# Altium PCB PCB11.PcbDoc
Units mil, origin at the board's own origin, x right, y up, seen from the top; angles counter-clockwise.
Board outline 4185 x 2955 mil, 2 copper layers (Top Layer, Bottom Layer); 168 components, 62 nets, 423 pads, 7 vias.
Unrouted connection lines stored in the file: 80.
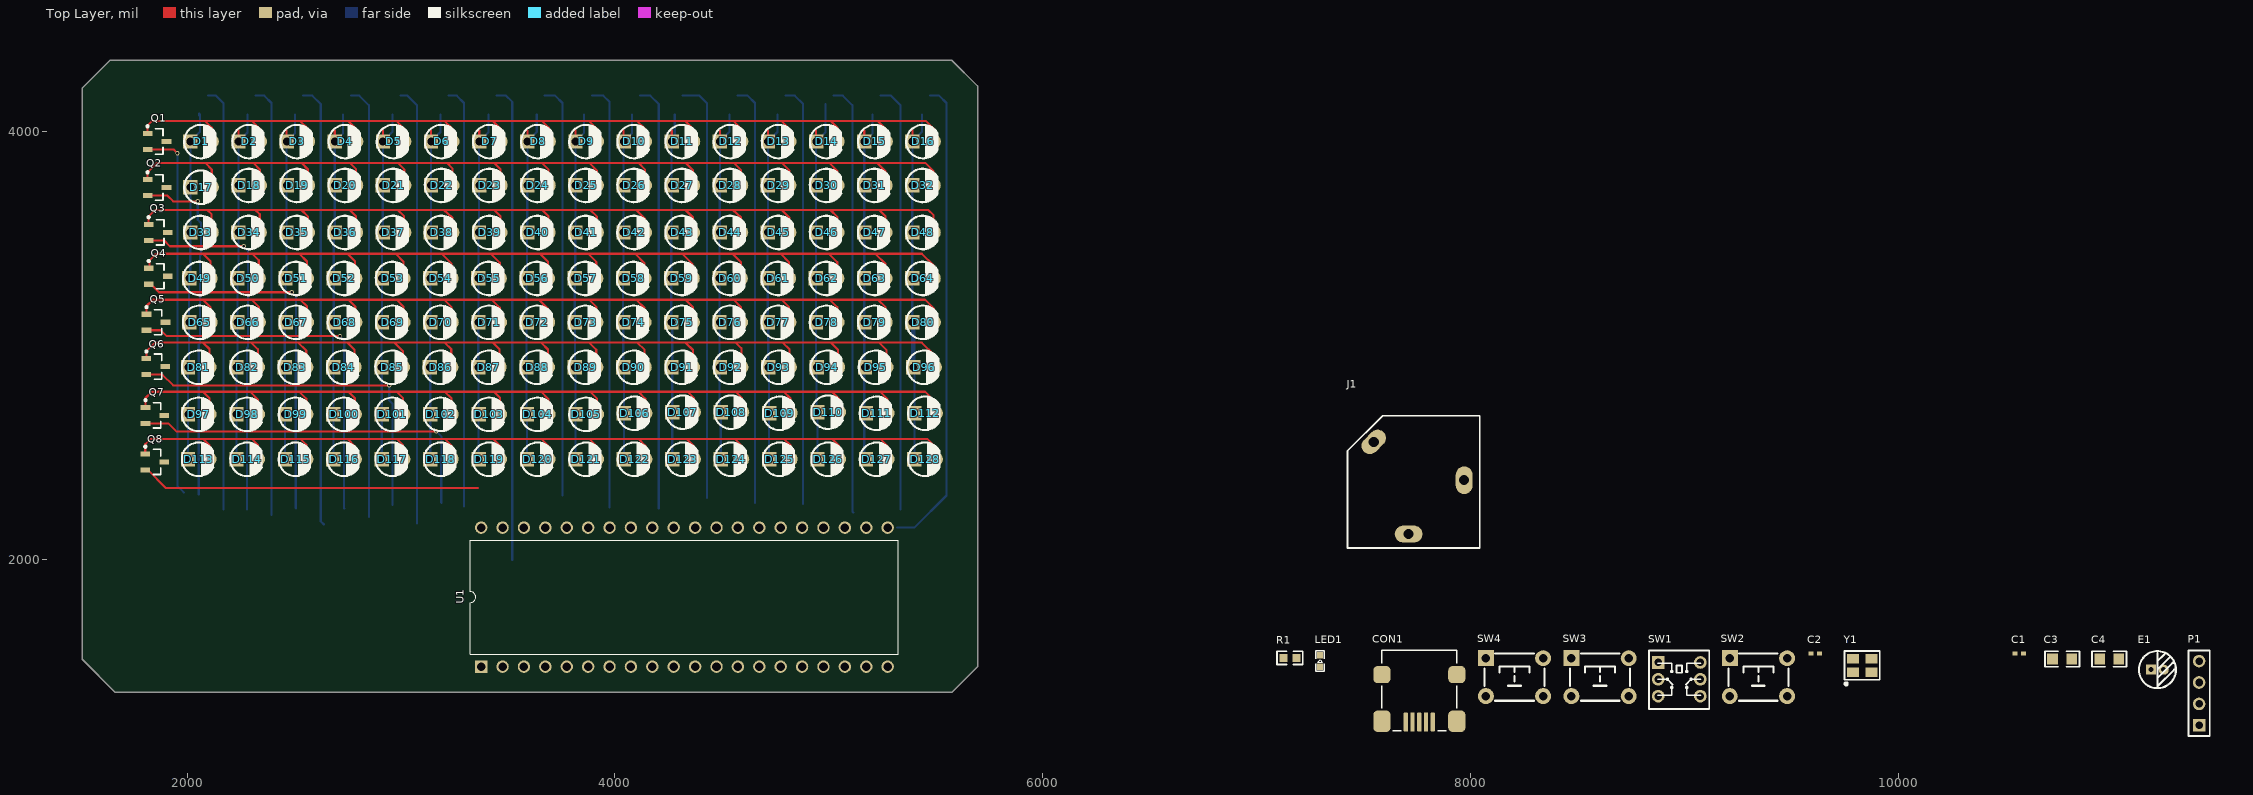
[diagram p0: Top Layer view]
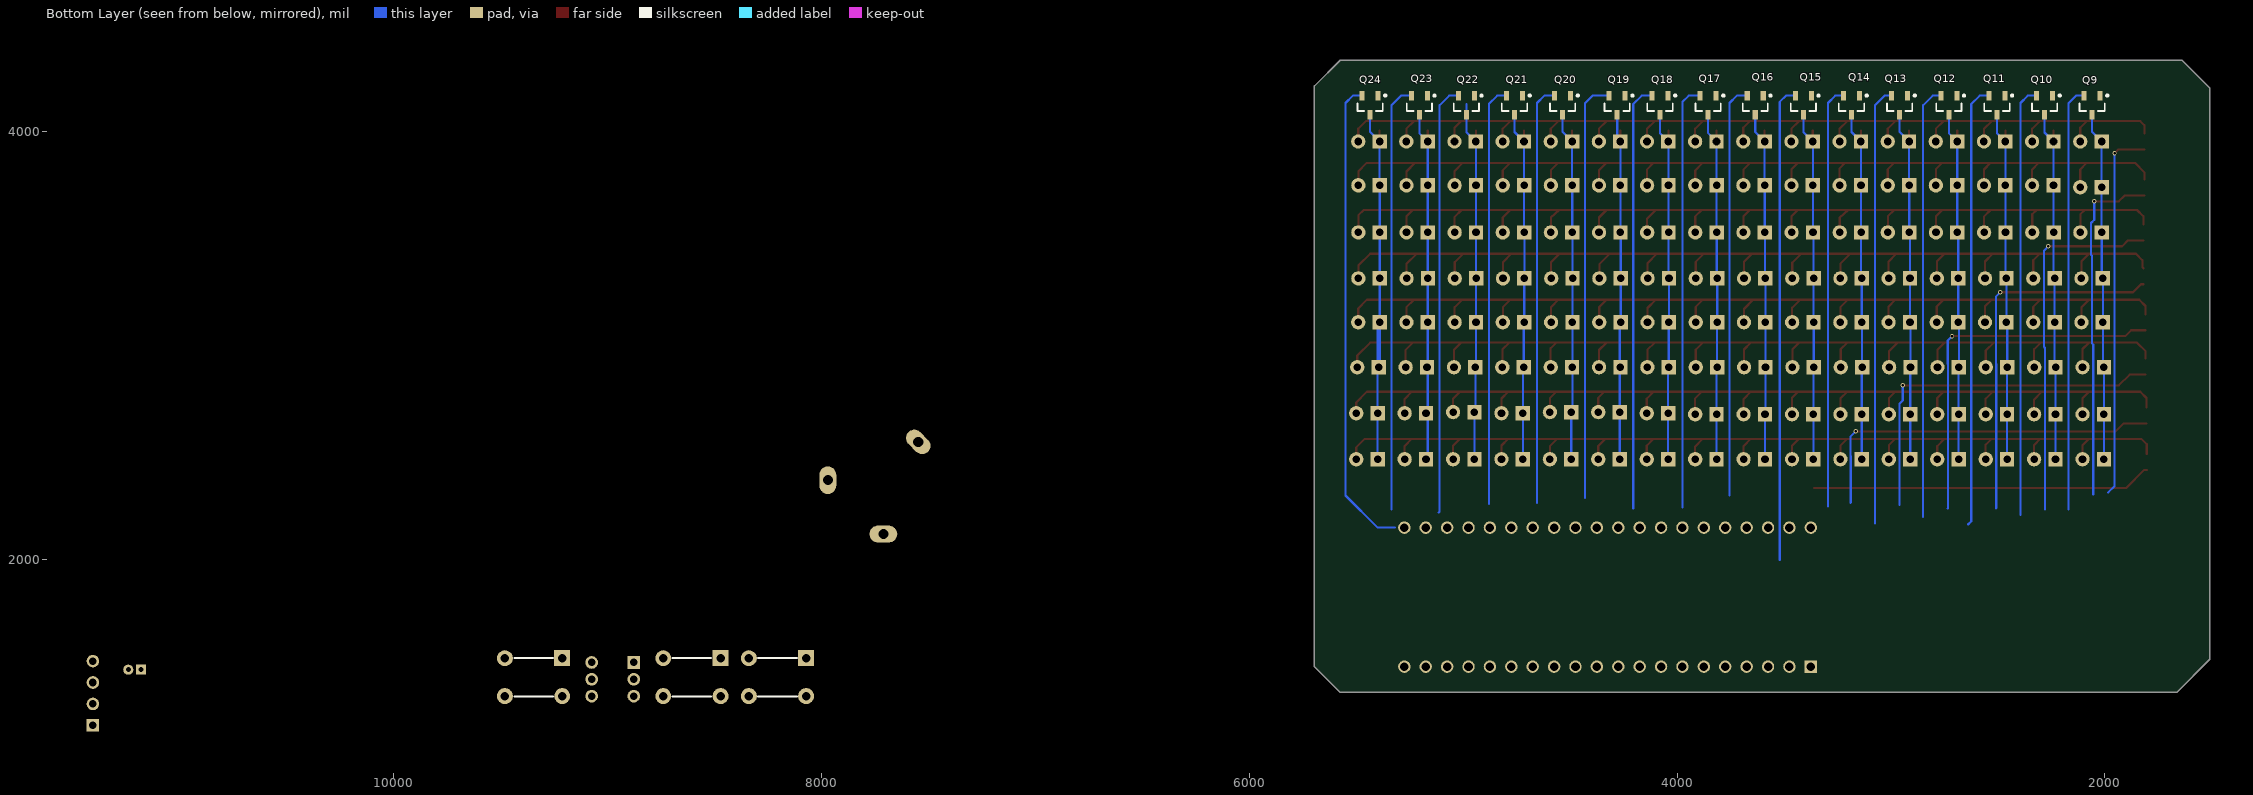
[diagram p1: Bottom Layer view, seen from below]

## Layer stack, top to bottom
Top Solder: solder mask 0.4, Solder Resist, Dk 3.5
Top Layer: signal copper 1.4
Dielectric 1: dielectric 12.6, FR-4, Dk 4.8
Bottom Layer: signal copper 1.4
Bottom Solder: solder mask 0.4, Solder Resist, Dk 3.5

## Board outline
1510,1535 1510,4205 1640,4335 5575,4335 5695,4215 5695,1500 5575,1380 1665,1380

## Design rules (kind name [scope] priority, off if disabled: settings)
Clearance [All] p1: gap=10 ignorepadtopadclearanceinfootprint=FALSE except(0: Arc-Hole Track-Hole SMDPad-Hole THPad-Hole Via-Hole Fill-Hole Poly-Hole Region-Hole Text-Hole)
PolygonConnect [All] p1: connectstyle=Relief reliefconductorwidth=10 reliefentries=4 polygonreliefangle="90 Angle" airgapwidth=10
RoutingVias [All] p1: holewidth=28 width=50 viastyle="Through Hole" minholewidth=28 minwidth=50 maxholewidth=28 maxwidth=50
SolderMaskExpansion [All] p1: expansion=4
Width [All] p1: maxlimit=10 minlimit=10 preferedwidth=10
30 further rules are at their usual default settings.

## Classes and differential pairs
component class Sheet3: D1 D2 D3 D4 D5 D6 D7 D8 D9 D10 D11 D12 D13 D14 D15 D16 D17 D18 D19 D20 D21 D22 D23 D24 D25 D26 D27 D28 D29 D30 D31 D32 D33 D34 D35 D36 D37 D38 D39 D40 D41 D42 D43 D44 D45 D46 D47 D48 D49 D50 D51 D52 D53 D54 D55 D56 D57 D58 D59 D60 D61 D62 D63 D64 D65 D66 D67 D68 D69 D70 D71 D72 D73 D74 D75 D76 D77 D78 D79 D80 D81 D82 D83 D84 D85 D86 D87 D88 D89 D90 D91 D92 D93 D94 D95 D96 D97 D98 D99 D100 D101 D102 D103 D104 D105 D106 D107 D108 D109 D110 D111 D112 D113 D114 D115 D116 D117 D118 D119 D120 D121 D122 D123 D124 D125 D126 D127 D128 Q1 Q2 Q3 Q4 Q5 Q6 Q7 Q8 Q9 Q10 Q12 Q13 Q14 Q15 Q16 Q17 Q18 Q19 Q20 Q21 Q22 Q23 Q24
component class Sheet2: C1 C2 C3 C4 CON1 E1 J1 LED1 P1 R1 SW1 SW2 SW3 SW4 U1 Y1

## Components (designator, comment, footprint, x,y, rotation, side; value= is the part's Value field where it differs from the comment)
C1 "Cap" 0402 10565.2,1561.06 r0 top value=30pF
C2 "Cap" 0402 9610.2,1561.06 r0 top value=30pF
C3 "104" "C 0805" 10765.2,1536.06 r0 top
C4 "104" "C 0805" 10985.2,1536.06 r0 top
CON1 "MiniUSB" USB_Mini-B 7760.2,1241.06 r0 top value="Type B"
D1 "LED0" "LED 3MM-R" 2065.71,3955 r0 top
D2 "LED0" "LED 3MM-R" 2290.71,3955 r0 top
D3 "LED0" "LED 3MM-R" 2515.71,3955 r0 top
D4 "LED0" "LED 3MM-R" 2740.71,3955 r0 top
D5 "LED0" "LED 3MM-R" 2965.71,3955 r0 top
D6 "LED0" "LED 3MM-R" 3190.71,3955 r0 top
D7 "LED0" "LED 3MM-R" 3415.71,3955 r0 top
D8 "LED0" "LED 3MM-R" 3640.71,3955 r0 top
D9 "LED0" "LED 3MM-R" 3865.71,3955 r0 top
D10 "LED0" "LED 3MM-R" 4090.71,3955 r0 top
D11 "LED0" "LED 3MM-R" 4315.71,3955 r0 top
D12 "LED0" "LED 3MM-R" 4540.71,3955 r0 top
D13 "LED0" "LED 3MM-R" 4765.71,3955 r0 top
D14 "LED0" "LED 3MM-R" 4990.71,3955 r0 top
D15 "LED0" "LED 3MM-R" 5215.71,3955 r0 top
D16 "LED0" "LED 3MM-R" 5440.71,3955 r0 top
D17 "LED0" "LED 3MM-R" 2065.71,3741.43 r0 top
D18 "LED0" "LED 3MM-R" 2290.66,3750 r0 top
D19 "LED0" "LED 3MM-R" 2515.61,3750 r0 top
D20 "LED0" "LED 3MM-R" 2740.57,3750 r0 top
D21 "LED0" "LED 3MM-R" 2965.52,3750 r0 top
D22 "LED0" "LED 3MM-R" 3190.47,3750 r0 top
D23 "LED0" "LED 3MM-R" 3415.42,3750 r0 top
D24 "LED0" "LED 3MM-R" 3640.38,3750 r0 top
D25 "LED0" "LED 3MM-R" 3865.33,3750 r0 top
D26 "LED0" "LED 3MM-R" 4090.28,3750 r0 top
D27 "LED0" "LED 3MM-R" 4315.24,3750 r0 top
D28 "LED0" "LED 3MM-R" 4540.19,3750 r0 top
D29 "LED0" "LED 3MM-R" 4765.14,3750 r0 top
D30 "LED0" "LED 3MM-R" 4990.09,3750 r0 top
D31 "LED0" "LED 3MM-R" 5215.05,3750 r0 top
D32 "LED0" "LED 3MM-R" 5440,3750 r0 top
D33 "LED0" "LED 3MM-R" 2065,3530 r0 top
D34 "LED0" "LED 3MM-R" 2290,3530 r0 top
D35 "LED0" "LED 3MM-R" 2515,3530 r0 top
D36 "LED0" "LED 3MM-R" 2740,3530 r0 top
D37 "LED0" "LED 3MM-R" 2965,3530 r0 top
D38 "LED0" "LED 3MM-R" 3190,3530 r0 top
D39 "LED0" "LED 3MM-R" 3415,3530 r0 top
D40 "LED0" "LED 3MM-R" 3640,3530 r0 top
D41 "LED0" "LED 3MM-R" 3865,3530 r0 top
D42 "LED0" "LED 3MM-R" 4090,3530 r0 top
D43 "LED0" "LED 3MM-R" 4315,3530 r0 top
D44 "LED0" "LED 3MM-R" 4540,3530 r0 top
D45 "LED0" "LED 3MM-R" 4765,3530 r0 top
D46 "LED0" "LED 3MM-R" 4990,3530 r0 top
D47 "LED0" "LED 3MM-R" 5215,3530 r0 top
D48 "LED0" "LED 3MM-R" 5440,3530 r0 top
D49 "LED0" "LED 3MM-R" 2060,3315 r0 top
D50 "LED0" "LED 3MM-R" 2285.33,3315 r0 top
D51 "LED0" "LED 3MM-R" 2510.67,3315 r0 top
D52 "LED0" "LED 3MM-R" 2736,3315 r0 top
D53 "LED0" "LED 3MM-R" 2961.33,3315 r0 top
D54 "LED0" "LED 3MM-R" 3186.67,3315 r0 top
D55 "LED0" "LED 3MM-R" 3412,3315 r0 top
D56 "LED0" "LED 3MM-R" 3637.33,3315 r0 top
D57 "LED0" "LED 3MM-R" 3862.67,3315 r0 top
D58 "LED0" "LED 3MM-R" 4088,3315 r0 top
D59 "LED0" "LED 3MM-R" 4313.33,3315 r0 top
D60 "LED0" "LED 3MM-R" 4538.67,3315 r0 top
D61 "LED0" "LED 3MM-R" 4764,3315 r0 top
D62 "LED0" "LED 3MM-R" 4989.33,3315 r0 top
D63 "LED0" "LED 3MM-R" 5214.66,3315 r0 top
D64 "LED0" "LED 3MM-R" 5440,3315 r0 top
D65 "LED0" "LED 3MM-R" 2060,3110 r0 top
D66 "LED0" "LED 3MM-R" 2285.38,3110 r0 top
D67 "LED0" "LED 3MM-R" 2510.76,3110 r0 top
D68 "LED0" "LED 3MM-R" 2736.14,3110 r0 top
D69 "LED0" "LED 3MM-R" 2961.52,3110 r0 top
D70 "LED0" "LED 3MM-R" 3186.9,3110 r0 top
D71 "LED0" "LED 3MM-R" 3412.28,3110 r0 top
D72 "LED0" "LED 3MM-R" 3637.66,3110 r0 top
D73 "LED0" "LED 3MM-R" 3863.04,3110 r0 top
D74 "LED0" "LED 3MM-R" 4088.42,3110 r0 top
D75 "LED0" "LED 3MM-R" 4313.81,3110 r0 top
D76 "LED0" "LED 3MM-R" 4539.19,3110 r0 top
D77 "LED0" "LED 3MM-R" 4764.57,3110 r0 top
D78 "LED0" "LED 3MM-R" 4989.95,3110 r0 top
D79 "LED0" "LED 3MM-R" 5215.33,3110 r0 top
D80 "LED0" "LED 3MM-R" 5440.71,3110 r0 top
D81 "LED0" "LED 3MM-R" 2055,2900 r0 top
D82 "LED0" "LED 3MM-R" 2281,2900 r0 top
D83 "LED0" "LED 3MM-R" 2507,2900 r0 top
D84 "LED0" "LED 3MM-R" 2733,2900 r0 top
D85 "LED0" "LED 3MM-R" 2959,2900 r0 top
D86 "LED0" "LED 3MM-R" 3185,2900 r0 top
D87 "LED0" "LED 3MM-R" 3411,2900 r0 top
D88 "LED0" "LED 3MM-R" 3637,2900 r0 top
D89 "LED0" "LED 3MM-R" 3863,2900 r0 top
D90 "LED0" "LED 3MM-R" 4089,2900 r0 top
D91 "LED0" "LED 3MM-R" 4315,2900 r0 top
D92 "LED0" "LED 3MM-R" 4541,2900 r0 top
D93 "LED0" "LED 3MM-R" 4767,2900 r0 top
D94 "LED0" "LED 3MM-R" 4993,2900 r0 top
D95 "LED0" "LED 3MM-R" 5219,2900 r0 top
D96 "LED0" "LED 3MM-R" 5445,2900 r0 top
D97 "LED0" "LED 3MM-R" 2055,2680 r0 top
D98 "LED0" "LED 3MM-R" 2281.33,2680 r0 top
D99 "LED0" "LED 3MM-R" 2507.67,2680 r0 top
D100 "LED0" "LED 3MM-R" 2734,2680 r0 top
D101 "LED0" "LED 3MM-R" 2960.33,2680 r0 top
D102 "LED0" "LED 3MM-R" 3186.67,2680 r0 top
D103 "LED0" "LED 3MM-R" 3413,2680 r0 top
D104 "LED0" "LED 3MM-R" 3639.33,2680 r0 top
D105 "LED0" "LED 3MM-R" 3865.67,2680 r0 top
D106 "LED0" "LED 3MM-R" 4092,2685 r0 top
D107 "LED0" "LED 3MM-R" 4318.33,2690 r0 top
D108 "LED0" "LED 3MM-R" 4544.67,2690 r0 top
D109 "LED0" "LED 3MM-R" 4771,2685 r0 top
D110 "LED0" "LED 3MM-R" 4997.33,2690 r0 top
D111 "LED0" "LED 3MM-R" 5223.67,2685 r0 top
D112 "LED0" "LED 3MM-R" 5450,2685 r0 top
D113 "LED0" "LED 3MM-R" 2055,2470 r0 top
D114 "LED0" "LED 3MM-R" 2281.33,2470 r0 top
D115 "LED0" "LED 3MM-R" 2507.67,2470 r0 top
D116 "LED0" "LED 3MM-R" 2734,2470 r0 top
D117 "LED0" "LED 3MM-R" 2960.33,2470 r0 top
D118 "LED0" "LED 3MM-R" 3186.67,2470 r0 top
D119 "LED0" "LED 3MM-R" 3413,2470 r0 top
D120 "LED0" "LED 3MM-R" 3639.33,2470 r0 top
D121 "LED0" "LED 3MM-R" 3865.67,2470 r0 top
D122 "LED0" "LED 3MM-R" 4092,2470 r0 top
D123 "LED0" "LED 3MM-R" 4318.33,2470 r0 top
D124 "LED0" "LED 3MM-R" 4544.67,2470 r0 top
D125 "LED0" "LED 3MM-R" 4771,2470 r0 top
D126 "LED0" "LED 3MM-R" 4997.33,2470 r0 top
D127 "LED0" "LED 3MM-R" 5223.67,2470 r0 top
D128 "LED0" "LED 3MM-R" 5450,2470 r0 top
E1 "10UF/16V" "CAP 1.5*4*8" 11210.2,1486.06 r0 top
J1 "Phonejack3" JACK/6-V3 7733.62,2364.09 r0 top
LED1 "红色" "LED 0603R" 7295.2,1526.06 r90 top
P1 "Header 4" HDR1X4 11405.2,1226.06 r90 top
Q1 "QNPN" SOT-23B_N 1860,3955 r0 top
Q2 "QNPN" SOT-23B_N 1860,3740 r0 top
Q3 "QNPN" SOT-23B_N 1865,3530 r0 top
Q4 "QNPN" SOT-23B_N 1865,3325 r0 top
Q5 "QNPN" SOT-23B_N 1855,3110 r0 top
Q6 "QNPN" SOT-23B_N 1854.29,2902.6 r0 top
Q7 "QNPN" SOT-23B_N 1850,2675 r0 top
Q8 "QNPN" SOT-23B_N 1849.29,2457.6 r0 top
Q9 "QNPN" SOT-23B_N 2060,4125 r270 bottom
Q10 "QNPN" SOT-23B_N 2282.44,4125 r270 bottom
Q11 "QNPN" SOT-23B_N 2504.84,4125 r270 bottom
Q12 "QNPN" SOT-23B_N 2729.84,4125 r270 bottom
Q13 "QNPN" SOT-23B_N 2959.84,4125 r270 bottom
Q14 "QNPN" SOT-23B_N 3184.84,4125 r270 bottom
Q15 "QNPN" SOT-23B_N 3409.84,4125 r270 bottom
Q16 "QNPN" SOT-23B_N 3634.84,4125 r270 bottom
Q17 "QNPN" SOT-23B_N 3854.84,4125 r270 bottom
Q18 "QNPN" SOT-23B_N 4079.84,4125 r270 bottom
Q19 "QNPN" SOT-23B_N 4280,4125 r270 bottom
Q20 "QNPN" SOT-23B_N 4535,4125 r270 bottom
Q21 "QNPN" SOT-23B_N 4760,4125 r270 bottom
Q22 "QNPN" SOT-23B_N 4985,4125 r270 bottom
Q23 "QNPN" SOT-23B_N 5205,4125 r270 bottom
Q24 "QNPN" SOT-23B_N 5435,4125 r270 bottom
R1 "1KΩ (1001) ±1%" 0603_R 7155.2,1541.06 r0 top
SW1 "KET 7X7" "KFT DIP-7X7" 8975.2,1441.06 r0 top
SW2 "SW-PB" "TSW DIP-6*6*5" 9345.2,1451.06 r0 top
SW3 "SW-PB" "TSW DIP-6*6*5" 8605.2,1451.06 r0 top
SW4 "SW-PB" "TSW DIP-6*6*5" 8205.2,1451.06 r0 top
U1 "STC12C5A60S2" DIP40 3375,1500 r90 top
Y1 "12MHz" SMD-3225_4P 9830.2,1506.06 r0 top

## Footprints (in the part's own frame and the unit in brackets; to place one, negate y for a bottom-side part, rotate by r counter-clockwise, add the part's x,y. Pads: shape width x height; smd on the part's side, far side on the other; paste and mask are expansions set on the pad)
0402 [mm] "Chip Capacitor, Body 1.0x0.5mm, IPC High Density"
  rect 0.6x0.5 smd: 1(-0.5,0) 2(0.5,0)
  body extent -0.55,-0.3 0.55,0.3, height 1.3
0603_R [mm]
  rect 0.93x0.98 smd: 1(-0.77,0) 2(0.77,0)
  silkscreen extent -1.53,-0.79 1.54,0.79, body extent -0.85,-0.4 0.85,0.4, height 0.56
"C 0805" [mil] "无极性贴片电容"
  rect 50x50 smd: 1(-45,0) 2(45,0)
  silkscreen extent -81,-36 81,36, body extent -39,-24 39,24, height 20
"CAP 1.5*4*8" [mm] "脚距1.5mm直径4mm高度8mm"
  rect 1.2x1.2 hole 0.6: 1(-0.75,0)
  round 1.2 hole 0.6: 2(0.75,0)
  silkscreen extent -2.2,-2.2 2.2,2.2, body extent -2,-2 2.02,2, height 8.04
DIP40 [mil]
  rect 58x58 hole 40: 1(0,0)
  round 58 hole 40: 2(0,-100) 3(0,-200) 4(0,-300) 5(0,-400) 6(0,-500) 7(0,-600) 8(0,-700) 9(0,-800) 10(0,-900) 11(0,-1000) 12(0,-1100) 13(0,-1200) 14(0,-1300) 15(0,-1400) 16(0,-1500) 17(0,-1600) 18(0,-1700) 19(0,-1800) 20(0,-1900) 21(650,-1900) 22(650,-1800) 23(650,-1700) 24(650,-1600) 25(650,-1500) 26(650,-1400) 27(650,-1300) 28(650,-1200) 29(650,-1100) 30(650,-1000) 31(650,-900) 32(650,-800) 33(650,-700) 34(650,-600) 35(650,-500) 36(650,-400) 37(650,-300) 38(650,-200) 39(650,-100) 40(650,0)
  silkscreen extent 58,-1950 592,50
HDR1X4 [mm] "Connector; Header; 4 Position"
  rect 1.5x1.5 hole 0.9: 1(0,0)
  round 1.5 hole 0.9: 2(2.54,0) 3(5.08,0) 4(7.62,0)
  silkscreen extent -1.27,-1.27 8.89,1.27
JACK/6-V3 [mm] "Connector; Jack Socket, 1/4\" [6.5mm], Thru-Hole, 3 Position, Vertical, Body 15.7 x 15.7 x 31 mm (WxTxH)"
  oval 2x3.3 hole 1.2: 1(6,0.2)
  oval 3.3x2 hole 1.2: 3(-0.6,-6.2)
  oval 2x3.3 hole 1.2 rot 135: 5(-4.738,4.738)
  round 3.7 hole 4: MH1(0,0)
  silkscreen extent -7.85,-7.85 7.85,7.85
"KFT DIP-7X7" [mm] "7*7mm开关"
  rect 1.5x1.5 hole 0.9: 1(-2.5,2)
  round 1.5 hole 0.9: 2(-2.5,0) 3(-2.5,-2) 4(2.5,-2) 5(2.5,0) 6(2.5,2)
  silkscreen extent -3.58,-3.51 3.56,3.42, body extent -3.5,-3.5 3.5,3.5, height 11.2
"LED 3MM-R" [mm] "红色3mm直插LED"
  rect 1.7x1.7 hole 0.9: 1(-1.27,0)
  round 1.7 hole 0.9: 2(1.27,0)
  silkscreen extent -2.01,-2 1.72,1.98, body extent -1.95,-1.95 1.64,1.95, height 5.55
"LED 0603R" [mil] "红色0603LED"
  rect 30x30 smd: 1(-27,0) 2(27.5,-0.06)
  silkscreen extent -48,-20 48,20, body extent -31,-16 32,16, height 24
SMD-3225_4P [mm]
  rect 1.4x1.15 smd: 1(-1.1,-0.8) 2(1.1,-0.8) 3(1.1,0.8) 4(-1.1,0.8)
  silkscreen extent -2.1,-2.35 2.1,1.7, body extent -1.6,-1.25 1.6,1.25, height 0.61
SOT-23B_N [mm] "SOT23, 3-Leads, Body 2.9x1.3mm, Pitch 0.95mm, Lead Span 2.4mm, IPC Medium Density"
  rect 1.15x0.6 smd: 1(-1.125,0.95) 2(-1.125,-0.95) 3(1.125,0)
  silkscreen extent -1.25,-1.5 0.7,1.92, body extent -0.7,-1.5 0.7,1.5, height 1.14
"TSW DIP-6*6*5" [mm] "6*6*5mm"
  rect 1.9x1.9 hole 1: 1(-3.4,2.25)
  round 1.9 hole 1: 2(-3.4,-2.25) 3(3.4,-2.25) 4(3.4,2.25)
  silkscreen extent -3.56,-2.79 3.56,2.79, body extent -4.11,-3 4.11,3, height 4.95
USB_Mini-B [mil]
  rrect50% 80x100 smd: 0(-175.2,3.94) 0(175.19,3.94)
  rrect50% 80x80 smd: 0(-175.2,221.69) 0(175.19,221.69)
  round 23.62 hole 35.43 unplated: 0(-86.61,102.36) 0(86.61,102.36)
  rrect50% 20x90 smd: 1(62.99,0) 2(31.5,0) 3(0,0) 4(-31.5,0) 5(-62.99,0)
  silkscreen extent -175,-40 175,335, body extent -211,-28 211,335, height 156

## Part data
C1 C2: "Capacitor", LatestRevisionDate=17-Jul-2002, LatestRevisionNote="Re-released for DXP Platform.", PackageReference=RAD-0.3, Published=8-Jun-2000, Publisher="Altium Limited"
C3 C4: library part C, "无极性贴片电容"
CON1: library part USB_Mini, "USB"
D1 D2 D3 D4 D5 D6 D7 D8 D9 D10 D11 D12 D13 D14 D15 D16 D17 D18 D19 D20 D21 D22 D23 D24 D25 D26 D27 D28 D29 D30 D31 D32 D33 D34 D35 D36 D37 D38 D39 D40 D41 D42 D43 D44 D45 D46 D47 D48 D49 D50 D51 D52 D53 D54 D55 D56 D57 D58 D59 D60 D61 D62 D63 D64 D65 D66 D67 D68 D69 D70 D71 D72 D73 D74 D75 D76 D77 D78 D79 D80 D81 D82 D83 D84 D85 D86 D87 D88 D89 D90 D91 D92 D93 D94 D95 D96 D97 D98 D99 D100 D101 D102 D103 D104 D105 D106 D107 D108 D109 D110 D111 D112 D113 D114 D115 D116 D117 D118 D119 D120 D121 D122 D123 D124 D125 D126 D127 D128: "Typical INFRARED GaAs LED", LatestRevisionDate=08-Jul-2005, LatestRevisionNote="Mech Layer 1 removed.", PackageDescription="LED; 2 Leads", PackageReference=LED-0, Published=8-Jun-2000, Publisher="Altium Limited"
E1: library part C-CAP, "直插电解电容"
J1: "Jack Socket, 1/4\" [6.5mm], Thru-Hole, Vertical, 3-Conductor Open Circuit (Non-Normalling)", PackageDocument=2003, ComponentLink1Description="Manufacturer Link", ComponentLink1URL=http://www.cliffuk.co.uk/, DatasheetDocument=2003, DrillAndSlotSize="Corresponds to nominal value.", LatestRevisionDate=15-Jul-2004, LatestRevisionNote="Component Replaced.", PackageReference=S1VS_SSS, PCB_Layout="Complies with manufacturer's recommendation.", Published=15-Jul-2004, Publisher="Altium Limited"
LED1: library part LED-3MM, "插件LED", BOM名称=插件LED, 学习资源=www.ooocke.com, 版权归属=源创客
P1: "Header, 4-Pin", LatestRevisionDate=17-Jul-2002, LatestRevisionNote="Re-released for DXP Platform.", Publisher="Altium Limited"
Q1 Q2 Q3 Q4 Q5 Q6 Q7 Q8 Q9 Q10 Q11 Q12 Q13 Q14 Q15 Q16 Q17 Q18 Q19 Q20 Q21 Q22 Q23 Q24: "NPN Bipolar Transistor", LatestRevisionDate=29-May-2009, LatestRevisionNote="IPC-7351 Footprint Added.", PackageDescription="3-Pin SOT-23 Package 0.95 mm Pitch, 2.4 mm Lead Span", PackageReference=SOT-23B, PackageVersion=Aug-1999, Published=8-Jun-2000, Publisher="Altium Limited"
R1: library part "0603 1KΩ (1001) 1%", "贴片电阻", Package=0603, SuppliersPartNumber=C21190, ComponentLink1Description=供应商链接, ComponentLink1URL=http://www.szlcsc.com/product/details_21904.html, Supplier=LC
SW1: "7*7开关", BOM名称=7*7开关, 学习资源=www.ooocke.com, 版权归属=源创客
SW2 SW3 SW4: "Switch", LatestRevisionDate=17-Jul-2002, LatestRevisionNote="Re-released for DXP Platform.", PackageDescription="Switch; 2 Leads", PackageReference=SPST-2, Published=24-Mar-1999, Publisher="Altium Limited"
U1: library part AT89C51, "8-bit MCU"
Y1: library part XTAL, "Crystal Oscillator", LatestRevisionDate=17-Jul-2002, LatestRevisionNote="Re-released for DXP Platform.", PackageReference=R38, Published=8-Jun-2000, Publisher="Altium Limited"

## Via types
v1: diameter 20, hole 12, Top Layer to Bottom Layer, tented both sides, 7 vias

## Nets (pads, with @x,y where several pads share a name; then routed paths per layer and width w, separated by ;. In a path a pad name is that pad's centre, name@x,y a point inside that pad or via, vN(x,y) a via of type N, cw(c..) or ccw(c..) an arc to the next point about the centre after c; other vN are vias at no path point)
GND: C1.2 C2.2 C3.1 C4.1 CON1.5 E1.2 J1.5 P1.4 Q1.3 Q2.3 Q3.3 Q4.3 Q5.3 Q6.3 Q7.3 Q8.3 SW2.2 SW3.2 SW4.2 U1.20
NetC1_1: C1.1 U1.19 Y1.3
NetC2_1: C2.1 U1.18 Y1.1
NetD1_1: D1.1 D17.1 D33.1 D49.1 D65.1 D81.1 D97.1 D113.1 Q9.3 | length 1641.2
  Bottom Layer w10: D113.1 D97.1 D81.1 2010,2905 D65.1 D49.1 2015,3320 D33.1 2015.71,3530.71 D17.1 D1.1 2060,3999.29 Q9.3 ; Q9.3@2057.24,4077.95 Q9.3@2057.24,4085.71
NetD1_2: D1.2 D2.2 D3.2 D4.2 D5.2 D6.2 D7.2 D8.2 D9.2 D10.2 D11.2 D12.2 D13.2 D14.2 D15.2 D16.2 Q1.1 | length 5436
  Top Layer w10: Q1.1 1815.71,4030.71 1835,4050 2085,4050 ; D1.2 2115.71,4019.29 2085,4050 ; D2.2 2340.71,4014.29 2305,4050 ; D3.2 2565.71,4014.29 2530,4050 ; D4.2 2790.71,4014.29 2755,4050 ; D5.2 3015.71,4014.29 2980,4050 ; D6.2 3240.71,4014.29 3205,4050 ; D7.2 3465.71,4014.29 3430,4050 ; D8.2 3690.71,4019.29 3660,4050 ; D9.2 3915.71,4014.29 3880,4050 ; D10.2 4140.71,4014.29 4105,4050 ; D11.2 4365.71,4014.29 4330,4050 ; D12.2 4590.71,4014.29 4555,4050 ; D13.2 4815.71,4014.29 4780,4050 ; D14.2 5040.71,4019.29 5010,4050 ; D15.2 5265.71,4014.29 5230,4050 ; D16.2 5490.71,4014.29 5455,4050 5230,4050 ; 2085,4050 2305,4050 ; 2305,4050 2530,4050 ; 2530,4050 2755,4050 ; 2755,4050 2980,4050 ; 2980,4050 3205,4050 ; 3205,4050 3430,4050 ; 3430,4050 3660,4050 ; 3660,4050 3880,4050 ; 3880,4050 4105,4050 ; 4105,4050 4330,4050 ; 4330,4050 4555,4050 ; 4555,4050 4780,4050 ; 4780,4050 5010,4050 ; 5010,4050 5230,4050
NetD2_1: D2.1 D18.1 D34.1 D50.1 D66.1 D82.1 D98.1 D114.1 Q10.3 | length 1682.2
  Top Layer w10: D2.1 2240.71,4005
  Bottom Layer w10: D114.1 D98.1 2231,2680.33 D82.1 2235.38,2904.38 D66.1 2235.33,3110.05 D50.1 2240,3319.67 D34.1 2240.66,3530.66 D18.1 D18.1 D2.1 2282.44,3996.73 Q10.3
NetD3_1: D3.1 D19.1 D35.1 D51.1 D67.1 D83.1 D99.1 D115.1 Q11.3 | length 1680.9
  Top Layer w10: D3.1 2465.71,4005
  Bottom Layer w10: D115.1 D99.1 2457.67,2899.33 D83.1 2457,3106.24 D67.1 2460.76,3314.91 D51.1 2465,3319.33 D35.1 2465.61,3530.61 D19.1 2465.71,3750.09 D3.1 2504.84,3994.13 Q11.3
NetD4_1: D4.1 D20.1 D36.1 D52.1 D68.1 D84.1 D100.1 D116.1 Q12.3 | length 1680.6
  Top Layer w10: D4.1 2690.71,4005
  Bottom Layer w10: D116.1 D100.1 2684,2899 D84.1 2683,3106.86 D68.1 2686.14,3314.86 D52.1 2686,3526 D36.1 2690.57,3530.57 D20.1 2690.71,3750.14 D4.1 2729.84,3994.13 Q12.3
NetD5_1: D5.1 D21.1 D37.1 D53.1 D69.1 D85.1 D101.1 D117.1 Q13.3 | length 1682.5
  Top Layer w10: D5.1 2915.71,4005
  Bottom Layer w10: D117.1 D101.1 2910.33,2898.67 D85.1 2909,3107.48 D69.1 2911.52,3314.81 D53.1 2911.33,3526.33 D37.1 2915,3749.48 D21.1 2915.52,3954.81 D5.1 2959.84,3999.13 Q13.3
NetD6_1: D6.1 D22.1 D38.1 D54.1 D70.1 D86.1 D102.1 D118.1 Q14.3 | length 1682.2
  Top Layer w10: D6.1 3140.71,4005
  Bottom Layer w10: D118.1 D102.1 3136.67,2898.33 D86.1 3135,3108.1 D70.1 3136.9,3314.76 D54.1 3140,3318.33 D38.1 3140,3749.53 D22.1 3140.47,3954.76 D6.1 3184.84,3999.13 Q14.3
NetD7_1: D7.1 D23.1 D39.1 D55.1 D71.1 D87.1 D103.1 D119.1 Q15.3 | length 1682
  Top Layer w10: D7.1 3365.71,4005
  Bottom Layer w10: D119.1 D103.1 3363,2898 D87.1 3361,3108.72 D71.1 3362.28,3314.72 D55.1 3362,3527 D39.1 3365,3749.57 D23.1 3365.42,3954.72 D7.1 3409.84,3999.13 Q15.3
NetD8_1: D8.1 D24.1 D40.1 D56.1 D72.1 D88.1 D104.1 D120.1 Q16.3 | length 1681.8
  Top Layer w10: D8.1 3590.71,4005
  Bottom Layer w10: D120.1 D104.1 3587,2682.33 D88.1 3587.66,2900.66 D72.1 3587.33,3110.33 D56.1 3590,3317.67 D40.1 3590.38,3530.38 D24.1 3590.71,3750.33 D8.1 3634.84,3999.13 Q16.3
NetD9_1: D9.1 D25.1 D41.1 D57.1 D73.1 D89.1 D105.1 D121.1 Q17.3 | length 1679.5
  Top Layer w10: D9.1 3815.71,4005
  Bottom Layer w10: D121.1 D105.1 3815.67,2897.33 D89.1 D73.1 D73.1 3812.67,3110.38 D57.1 3815,3317.33 D41.1 3815.33,3530.33 D25.1 3815.71,3750.38 D9.1 3854.84,3994.13 Q17.3
NetD10_1: D10.1 D26.1 D42.1 D58.1 D74.1 D90.1 D106.1 D122.1 Q18.3 | length 1679.7
  Top Layer w10: D10.1 4040.71,4005
  Bottom Layer w10: D122.1 D106.1 4042,2897 D90.1 4039,3109.42 D74.1 4038.42,3314.57 D58.1 4040,3317 D42.1 4040.28,3530.28 D26.1 4040.71,3750.43 D10.1 4079.84,3994.13 Q18.3
NetD11_1: D11.1 D27.1 D43.1 D59.1 D75.1 D91.1 D107.1 D123.1 Q19.3 | length 1669.5
  Top Layer w10: D11.1 4265.71,4005
  Bottom Layer w10: D75.1@4263.33,3110 D59.1 4263.33,3528.33 D43.1 4265,3749.76 D27.1 4265.24,3954.53 D11.1 4280,3969.29 Q19.3 ; D75.1 4268.33,3105.47 D107.1 D123.1
NetD12_1: D12.1 D28.1 D44.1 D60.1 D76.1 D92.1 D108.1 D124.1 Q20.3 | length 1682.4
  Top Layer w10: D12.1 4490.71,4005
  Bottom Layer w10: D124.1 D108.1 4489.19,2695.48 D76.1 4489.19,3314.48 D60.1 4488.67,3528.67 D44.1 4490,3749.81 D28.1 4490.71,3750.52 D12.1 4535,3999.29 Q20.3
NetD13_1: D13.1 D29.1 D45.1 D61.1 D77.1 D93.1 D109.1 D125.1 Q21.3 | length 1682.7
  Top Layer w10: D13.1 4715.71,4005
  Bottom Layer w10: D125.1 D109.1 4721,2896 D93.1 4717,3107.57 D77.1 4714.57,3314.43 D61.1 4714,3529 D45.1 4715,3749.86 D29.1 4715.14,3954.43 D13.1 4760,3999.29 Q21.3
NetD14_1: D14.1 D30.1 D46.1 D62.1 D78.1 D94.1 D110.1 D126.1 Q22.3 | length 1732.9
  Top Layer w10: D14.1 4940.71,4005
  Bottom Layer w10: D126.1 D110.1 4943,2694.33 D94.1 4939.95,2903.05 D78.1 4939.33,3110.61 D62.1 4940,3315.67 D46.1 4940.09,3530.09 D30.1 4940.71,3750.61 D14.1 4985,3999.29 Q22.3 4985,4130.71
NetD15_1: D15.1 D31.1 D47.1 D63.1 D79.1 D95.1 D111.1 D127.1 Q23.3 | length 1681.1
  Top Layer w10: D15.1 5165.71,4005
  Bottom Layer w10: D127.1 5165.33,2478.34 D79.1 5165.33,3314.34 D63.1 5165.71,3316.04 D15.1 5205,3994.29 Q23.3
NetD16_1: D16.1 D32.1 D48.1 D64.1 D80.1 D96.1 D112.1 D128.1 Q24.3 | length 2327.6
  Top Layer w10: D16.1 5390.71,4005
  Bottom Layer w10: D64.1 5390,2905 D96.1 D96.1@5400,2895 ; D32.1 D48.1 ; D128.1 D112.1 D96.1@5400,2895 ; Q24.3 5435,3999.29 D16.1 5390.71,3530.71 D48.1 ; D48.1 5390,3110.71 D80.1 5400,3100.71 D96.1@5400,2895
NetD17_2: D17.2 D18.2 D19.2 D20.2 D21.2 D22.2 D23.2 D24.2 D25.2 D26.2 D27.2 D28.2 D29.2 D30.2 D31.2 D32.2 Q2.1 | length 5594.3
  Top Layer w10: Q2.1 1815.71,3810.71 1860,3855 2085,3855 ; D17.2 2115.71,3824.29 2085,3855 ; D18.2 2340.66,3824.34 2310,3855 ; D19.2 2565.61,3824.39 2535,3855 ; D20.2 2790.57,3824.43 2760,3855 ; D21.2 3015.52,3824.48 2985,3855 ; D22.2 3240.47,3829.53 3215,3855 ; D23.2 3465.42,3824.58 3435,3855 ; D24.2 3690.38,3822.12 3657.5,3855 ; D25.2 3915.33,3819.67 3880,3855 ; D26.2 4140.28,3824.72 4110,3855 ; D27.2 4365.24,3819.76 4330,3855 ; D28.2 4590.19,3819.81 4555,3855 ; D29.2 4815.14,3819.86 4780,3855 ; D30.2 5040.09,3817.41 5002.5,3855 ; D31.2 5265.05,3814.95 5225,3855 ; D32.2 5490,3815 5450,3855 5225,3855 ; 2085,3855 2310,3855 ; 2310,3855 2535,3855 ; 2535,3855 2760,3855 ; 2760,3855 2985,3855 ; 2985,3855 3215,3855 ; 3215,3855 3435,3855 ; 3435,3855 3657.5,3855 ; 3657.5,3855 3880,3855 ; 3880,3855 4110,3855 ; 4110,3855 4330,3855 ; 4330,3855 4555,3855 ; 4555,3855 4780,3855 ; 4780,3855 5002.5,3855 ; 5002.5,3855 5225,3855
NetD33_2: D33.2 D34.2 D35.2 D36.2 D37.2 D38.2 D39.2 D40.2 D41.2 D42.2 D43.2 D44.2 D45.2 D46.2 D47.2 D48.2 Q3.1 | length 5588.9
  Top Layer w10: Q3.1 1820.71,3605.71 1850,3635 2095,3635 ; D33.2 2115,3615 2095,3635 ; D34.2 2340,3615 2320,3635 ; D35.2 2565,3605 2535,3635 ; D36.2 2790,3605 2760,3635 ; D37.2 3015,3605 2985,3635 ; D38.2 3240,3600 3200,3635 ; 3437.66,3632.34 3465,3605 D39.2 ; D40.2 3690,3605 3660,3635 ; D41.2 3915,3605 3885,3635 ; D42.2 4140,3595 4100,3635 ; D43.2 4365,3600 4330,3635 ; 4550,3635 4330,3635 ; D44.2 4590,3600 4550.49,3634.57 4780.43,3634.57 4815,3600 D45.2 ; 4770,3635 5007.5,3635 ; D46.2 5040,3602.5 5007.5,3635 ; D47.2 5265,3605 5235,3635 ; D48.2 5490,3610 5465,3635 5235,3635 ; 2095,3635 2320,3635 ; 2320,3635 2535,3635 ; 2535,3635 2760,3635 ; 2760,3635 2985,3635 ; 2985,3635 3200,3635 ; 3200,3635 3660,3635 ; 3660,3635 3885,3635 ; 3885,3635 4100,3635 ; 4100,3635 4330,3635 ; 5007.5,3635 5235,3635
NetD49_2: D49.2 D50.2 D51.2 D52.2 D53.2 D54.2 D55.2 D56.2 D57.2 D58.2 D59.2 D60.2 D61.2 D62.2 D63.2 D64.2 Q4.1 | length 5770
  Top Layer w10: Q4.1 1825,3366.69 1825,3400 1855,3430 2075,3430 ; D49.2 2110,3395 2075,3430 ; D50.2 2335.33,3399.67 2305,3430 ; D51.2 2560.67,3394.33 2525,3430 ; D52.2 2786,3394 2750,3430 ; D53.2 3011.33,3393.67 2975,3430 ; D54.2 3236.67,3383.33 3190,3430 ; D55.2 3462,3388 3420,3430 ; D56.2 3687.33,3392.67 3650,3430 ; D57.2 3912.67,3392.33 3875,3430 ; D58.2 4138,3387 4095,3430 ; D59.2 4363.33,3381.67 4315,3430 ; D60.2 4588.67,3391.33 4550,3430 ; D61.2 4814,3391 4775,3430 ; D62.2 5039.33,3390.67 5000,3430 ; D63.2 5264.66,3382.84 5217.5,3430 ; D64.2 5490,3375 5435,3430 5217.5,3430 ; 2075,3430 2305,3430 ; 2305,3430 2525,3430 ; 2525,3430 2750,3430 ; 2750,3430 2975,3430 ; 2975,3430 3190,3430 ; 3190,3430 3420,3430 ; 3420,3430 3650,3430 ; 3650,3430 3875,3430 ; 3875,3430 4095,3430 ; 4095,3430 4315,3430 ; 4315,3430 4550,3430 ; 4550,3430 4775,3430 ; 4775,3430 5000,3430 ; 5000,3430 5217.5,3430
NetD65_2: D65.2 D66.2 D67.2 D68.2 D69.2 D70.2 D71.2 D72.2 D73.2 D74.2 D75.2 D76.2 D77.2 D78.2 D79.2 D80.2 Q5.1 | length 5602
  Top Layer w10: Q5.1 1810.71,3185.71 1840,3215 2075,3215 ; D65.2 2110,3180 2075,3215 ; D66.2 2335.38,3182.12 2302.5,3215 ; D67.2 2560.76,3184.24 2530,3215 ; D68.2 2786.14,3183.86 2755,3215 ; D69.2 3011.52,3183.48 2980,3215 ; D70.2 3236.9,3180.6 3202.5,3215 ; D71.2 3462.28,3177.72 3425,3215 ; D72.2 3687.66,3172.34 3645,3215 ; D73.2 3913.04,3181.96 3880,3215 ; D74.2 4138.42,3176.58 4100,3215 ; D75.2 4363.81,3181.2 4330,3215 ; D76.2 4589.19,3180.81 4555,3215 ; D77.2 4814.57,3180.43 4780,3215 ; D78.2 5039.95,3180.05 5005,3215 ; D79.2 5265.33,3179.67 5230,3215 ; D80.2 5490.71,3174.29 5450,3215 5230,3215 ; 2075,3215 2302.5,3215 ; 2302.5,3215 2530,3215 ; 2530,3215 2755,3215 ; 2755,3215 2980,3215 ; 2980,3215 3202.5,3215 ; 3202.5,3215 3425,3215 ; 3425,3215 3645,3215 ; 3645,3215 3880,3215 ; 3880,3215 4100,3215 ; 4100,3215 4330,3215 ; 4330,3215 4555,3215 ; 4555,3215 4780,3215 ; 4780,3215 5005,3215 ; 5005,3215 5230,3215
NetD81_2: D81.2 D82.2 D83.2 D84.2 D85.2 D86.2 D87.2 D88.2 D89.2 D90.2 D91.2 D92.2 D93.2 D94.2 D95.2 D96.2 Q6.1 | length 5744.4
  Top Layer w10: Q6.1 1810,2975 1850,3015 2075,3015 ; D81.2 2105,2985 2075,3015 ; D82.2 2331,2984 2300,3015 ; D83.2 2557,2978 2520,3015 ; D84.2 2783,2982 2750,3015 ; D85.2 3009,2976 2970,3015 ; D86.2 3235,2985 3205,3015 ; D87.2 3461,2984 3430,3015 ; D88.2 3687,2983 3655,3015 ; D89.2 3913,2982 3880,3015 ; D90.2 4139,2981 4105,3015 ; D91.2 4365,2980 4330,3015 ; D92.2 4591,2989 4565,3015 ; D93.2 4817,2983 4785,3015 ; D94.2 5043,2982 5010,3015 ; D95.2 5269,2981 5235,3015 ; D96.2 5495,2955 5435,3015 5235,3015 ; 2075,3015 2300,3015 ; 2300,3015 2520,3015 ; 2520,3015 2750,3015 ; 2750,3015 2970,3015 ; 2970,3015 3205,3015 ; 3205,3015 3430,3015 ; 3430,3015 3655,3015 ; 3655,3015 3880,3015 ; 3880,3015 4105,3015 ; 4105,3015 4330,3015 ; 4330,3015 4565,3015 ; 4565,3015 4785,3015 ; 4785,3015 5010,3015 ; 5010,3015 5235,3015
NetD97_2: D97.2 D98.2 D99.2 D100.2 D101.2 D102.2 D103.2 D104.2 D105.2 D106.2 D107.2 D108.2 D109.2 D110.2 D111.2 D112.2 Q7.1 | length 5545.1
  Top Layer w10: Q7.1 1805.71,2755.71 1835,2785 2075,2785 ; D97.2 2105,2755 2075,2785 ; D98.2 2331.33,2748.67 2295,2785 ; D99.2 2557.67,2752.33 2525,2785 ; D100.2 2784,2756 2755,2785 ; D101.2 3010.33,2754.67 2980,2785 ; D102.2 3236.67,2753.33 3205,2785 ; D103.2 3463,2757 3435,2785 ; D104.2 3689.33,2750.67 3655,2785 ; D105.2 3915.67,2754.33 3885,2785 ; D106.2 4142,2753 4110,2785 ; D107.2 4368.33,2756.67 4340,2785 ; D108.2 4594.67,2755.33 4565,2785 ; D109.2 4821,2754 4790,2785 ; D110.2 5047.33,2752.67 5015,2785 ; D111.2 5273.67,2751.33 5240,2785 ; D112.2 5500,2735 5450,2785 5240,2785 ; 2075,2785 2295,2785 ; 2295,2785 2525,2785 ; 2525,2785 2755,2785 ; 2755,2785 2980,2785 ; 2980,2785 3205,2785 ; 3205,2785 3435,2785 ; 3435,2785 3655,2785 ; 3655,2785 3885,2785 ; 3885,2785 4110,2785 ; 4110,2785 4340,2785 ; 4340,2785 4565,2785 ; 4565,2785 4790,2785 ; 4790,2785 5015,2785 ; 5015,2785 5240,2785
NetD113_2: D113.2 D114.2 D115.2 D116.2 D117.2 D118.2 D119.2 D120.2 D121.2 D122.2 D123.2 D124.2 D125.2 D126.2 D127.2 D128.2 Q8.1 | length 5446.8
  Top Layer w10: Q8.1 1805,2540 1830,2565 2075,2565 ; D113.2 2105,2535 2075,2565 ; D114.2 2331.33,2536.17 2302.5,2565 ; D115.2 2557.67,2537.33 2530,2565 ; D116.2 2784,2531 2750,2565 ; D117.2 3010.33,2534.67 2980,2565 ; D118.2 3236.67,2533.33 3205,2565 ; D119.2 3463,2532 3430,2565 ; D120.2 3689.33,2530.67 3655,2565 ; D121.2 3915.67,2529.33 3880,2565 ; D122.2 4142,2533 4110,2565 ; D123.2 4368.33,2531.67 4335,2565 ; D124.2 4594.67,2530.33 4560,2565 ; D125.2 4821,2534 4790,2565 ; D126.2 5047.33,2532.67 5015,2565 ; D127.2 5273.67,2531.33 5240,2565 ; D128.2 5500,2525 5460,2565 5240,2565 ; 2075,2565 2302.5,2565 ; 2302.5,2565 2530,2565 ; 2530,2565 2750,2565 ; 2750,2565 2980,2565 ; 2980,2565 3205,2565 ; 3205,2565 3430,2565 ; 3430,2565 3655,2565 ; 3655,2565 3880,2565 ; 3880,2565 4110,2565 ; 4110,2565 4335,2565 ; 4335,2565 4560,2565 ; 4560,2565 4790,2565 ; 4790,2565 5015,2565 ; 5015,2565 5240,2565
NetLED1_1: LED1.1 R1.2
P00: Q1.2 U1.39 | length 1744
  Top Layer w10: Q1.2 1937.4,3917.6 v1(1955,3900)
  Bottom Layer w10: v1(1955,3900) 1955,2345 1985,2315
P01: Q2.2 U1.38 | length 1626.1
  Top Layer w10: Q2.2 1907.4,3702.6 1935,3675 v1(2050,3675)
  Bottom Layer w10: v1(2050,3675) 2050,3588.65 2065,3573.65 2065,3425 2060,3420 2060,3010 2055,3005 2055,2305
P02: Q3.2 U1.37 | length 1696.3
  Top Layer w10: Q3.2 1892.4,3492.6 1920,3465 v1(2265,3465)
  Bottom Layer w10: v1(2265,3465) 2285.25,3444.75 2285.25,2995.25 2280,2990 2280,2235
P03: Q4.2 U1.36 | length 1704.4
  Top Layer w10: Q4.2 1831.54,3287.6 1869.13,3250 v1(2490,3250)
  Bottom Layer w10: v1(2490,3250) 2510,3230 2510,2916.78 2508.54,2915.31 2508.54,2241.46 2510,2240
P04: Q5.2 U1.35 | length 1729.4
  Top Layer w10: Q5.2 1877.4,3072.6 1905,3045 v1(2715,3045)
  Bottom Layer w10: v1(2715,3045) 2735,3025 2735,2915.78 2734.54,2915.31 2734.54,2240.46 2735,2240
P05: Q6.2 U1.34 | length 1722.3
  Top Layer w10: Q6.2 1884.8,2865.2 1935,2815 v1(2945,2815)
  Bottom Layer w10: v1(2945,2815) 2945,2743.97 2960.33,2728.64 2960.33,2360.33 2960,2360 2960,2255
P06: Q7.2 U1.33 | length 1721.7
  Top Layer w10: Q7.2 1912.4,2637.6 1950,2600 v1(3165,2600)
  Bottom Layer w10: v1(3165,2600) 3190,2575 3190,2487.11 3188.2,2485.31 3188.2,2266.8 3190,2265
P07: Q8.2 U1.32 | length 1590.3
  Top Layer w10: Q8.2 1815.83,2420.2 1901.02,2335 3360,2335
P10: J1.1 U1.1
P11: J1.3 U1.2
P12: Q11.2 U1.3 | length 2070.2
  Bottom Layer w10: Q11.2 2585.71,4169.29 2625,4130 2625,2180 2640,2165
P13: Q12.2 U1.4 | length 2026.1
  Bottom Layer w10: Q12.2 2805.71,4169.29 2850,4125 2850,2200
P14: Q13.2 U1.5 | length 2051.1
  Bottom Layer w10: Q13.2 3030.71,4169.29 3075,4125 3075,2170
P15: Q14.2 U1.6 | length 1972
  Bottom Layer w10: Q14.2 3260.71,4169.29 3295,4135 3295,2250
P16: Q15.2 U1.7 | length 2224.9
  Bottom Layer w10: Q15.2 3490.71,4169.29 3520,4140 3520,2000
P17: Q16.2 U1.8 | length 1932
  Bottom Layer w10: Q16.2 3720.71,4169.29 3755,4135 3755,2300
P20: Q17.2 U1.21 | length 1989.9
  Bottom Layer w10: Q17.2 3945.71,4169.29 3975,4140 3975,2245
P21: Q18.2 U1.22 | length 1994
  Bottom Layer w10: Q18.2 4165.71,4169.29 4205,4130 4205,2240
P22: Q19.2 U1.23 | length 1971.8
  Bottom Layer w10: Q19.2 4395.71,4169.29 4430,4135 4430,2290
P23: Q20.2 U1.24 | length 1966.8
  Bottom Layer w10: Q20.2 4620.71,4169.29 4655,4135 4655,2265
P24: Q21.2 U1.25 | length 1968.9
  Bottom Layer w10: Q21.2 4840.71,4169.29 4880,4130 4880,2260
P25: Q22.2 U1.26 | length 2013
  Bottom Layer w10: Q22.2 5065.71,4169.29 5110,4125 5110,2225 5115,2220
P26: Q23.2 U1.27 | length 2000.9
  Bottom Layer w10: Q23.2 5290.71,4169.29 5335,4125 5335,2235
P27: Q24.2 U1.28 | length 2219.9
  Bottom Layer w10: 5319,2150 5400,2150 5550,2300 5550,4135 5515.71,4169.29 Q24.2
P32: Q9.2 U1.12 | length 1986.6
  Bottom Layer w10: Q9.2 2135.35,4169.29 2170,4134.65 2170,2235
P33: Q10.2 U1.13 | length 2014.4
  Bottom Layer w10: Q10.2 2360.71,4169.29 2395,4135 2395,2210
P34: SW2.1 U1.14
P35: SW3.1 U1.15
P36: SW4.1 U1.16
P37: LED1.2 U1.17
RXD: P1.2 U1.10
TXD: P1.3 U1.11
VCC: C3.2 C4.2 E1.1 P1.1 Q9.1 Q10.1 Q11.1 Q12.1 Q13.1 Q14.1 Q15.1 Q16.1 Q17.1 Q18.1 Q19.1 Q20.1 Q21.1 Q22.1 Q23.1 Q24.1 R1.1 SW1.2 U1.31 U1.40
VUSB: CON1.1 SW1.3
pads on no net: CON1.0 CON1.2 CON1.3 CON1.4 J1.MH1 SW1.1 SW1.4 SW1.5 SW1.6 SW2.3 SW2.4 SW3.3 SW3.4 SW4.3 SW4.4 U1.9 U1.29 U1.30 Y1.2 Y1.4

## Silkscreen, mask and mechanical layers (free items; w line width, h text height)
Mechanical 1:
  lines w50: 1725,1400 1725,4295 5595,4295 5595,1400 1725,1400

## Text inside footprints (layer, text, board x,y; h text height)
J1: Mechanical 1 "Alert PCB fab to slot details" at 7422.6,2744.41 h11.81; Mechanical 1 "Slot 1.2x2.5mm, PTH" at 7422.6,2724.72 h11.81; Mechanical 1 "Assign keep-out area to slot" at 7422.6,2764.09 h11.81; Mechanical 1 "Mech 1 - Slot cut-out" at 7422.6,2705.04 h11.81; Mechanical 1 "Mech 2 - Clearance, move to internal plane if present" at 7422.6,2685.35 h11.81